# Altium PCB activity_tracker.PcbDoc
Units mm, origin at the board's own origin, x right, y up, seen from the top; angles counter-clockwise.
Board outline 24.9 x 24.88 mm, 4 copper layers (Top Layer, MidLayer1, Mid-Layer 2, Bottom Layer), stack 0.79 mm thick; 28 components, 30 nets, 125 pads, 49 vias.
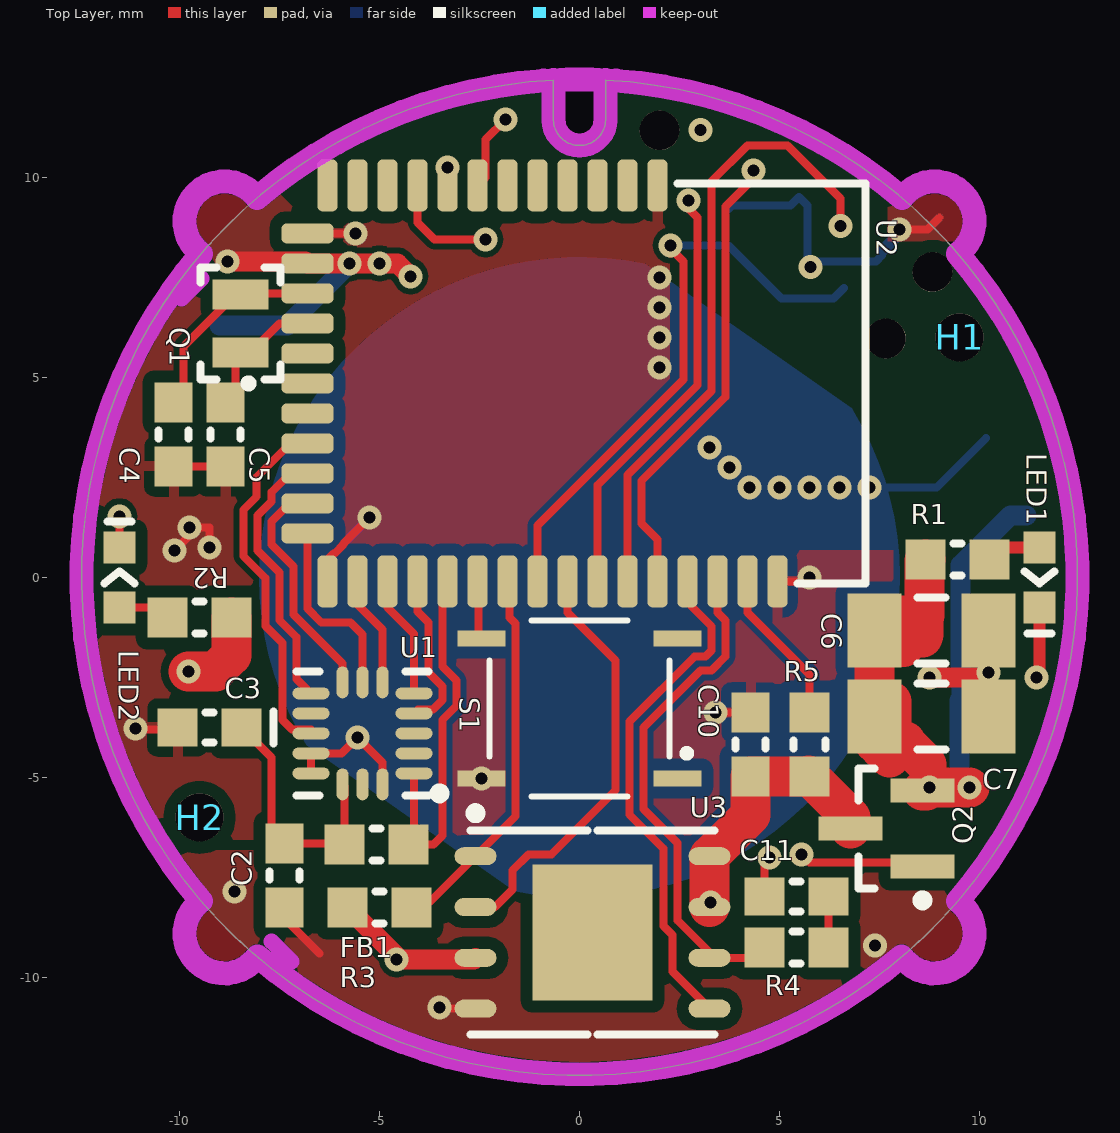
[diagram p0: Top Layer view]
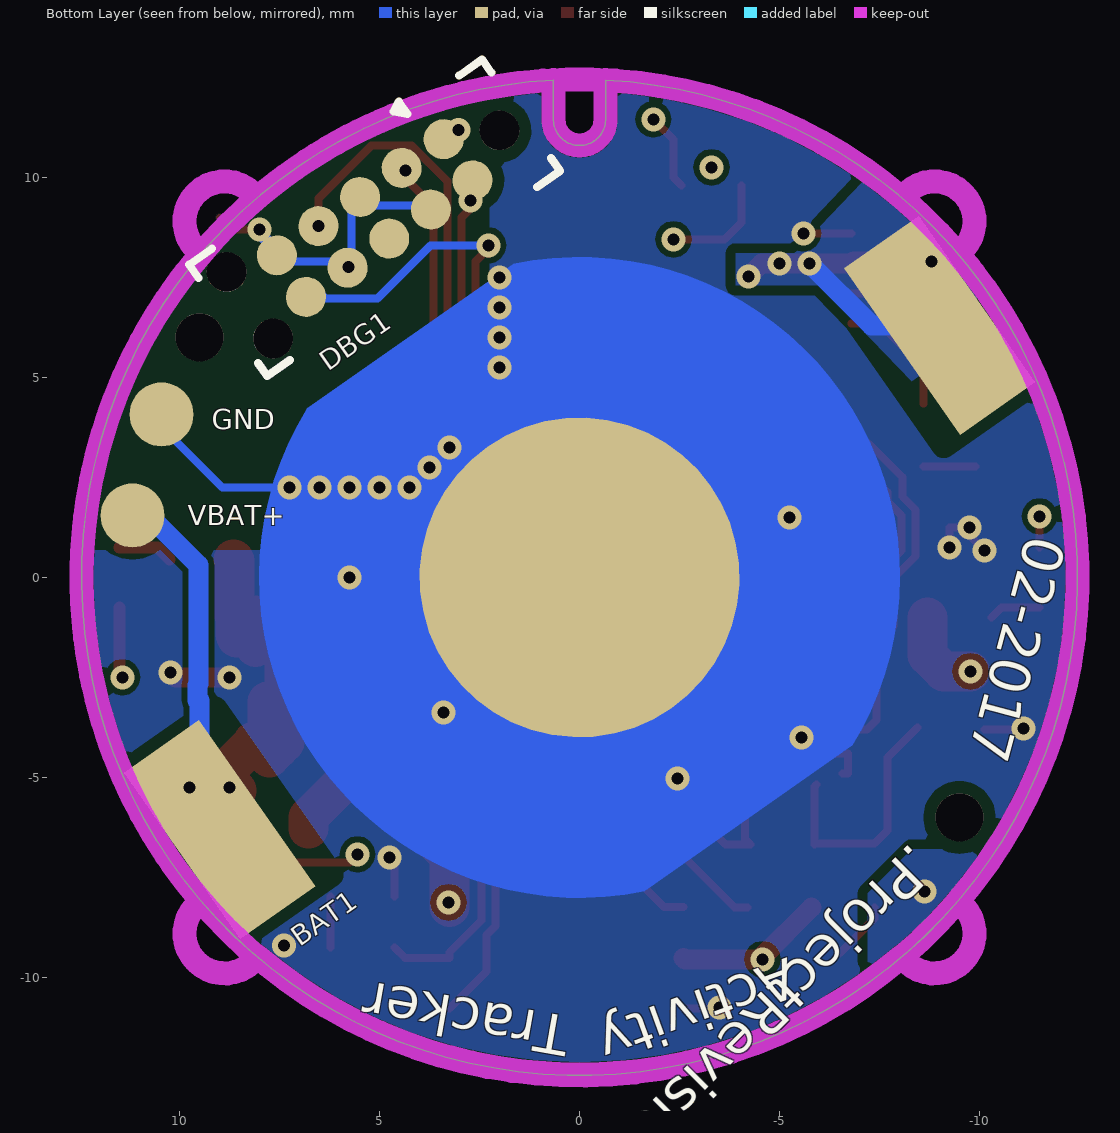
[diagram p1: Bottom Layer view, seen from below]
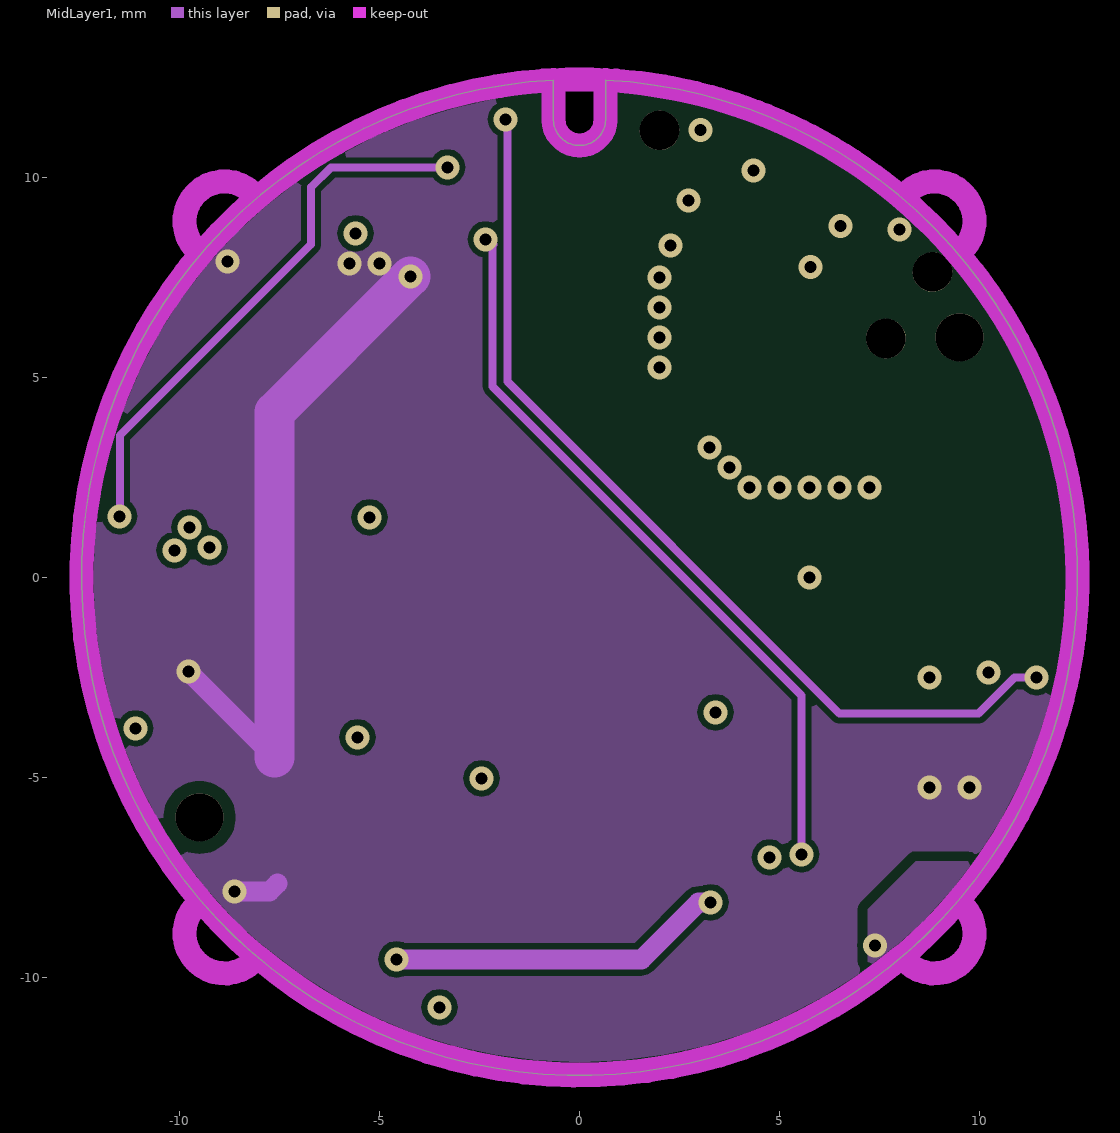
[diagram p2: MidLayer1]
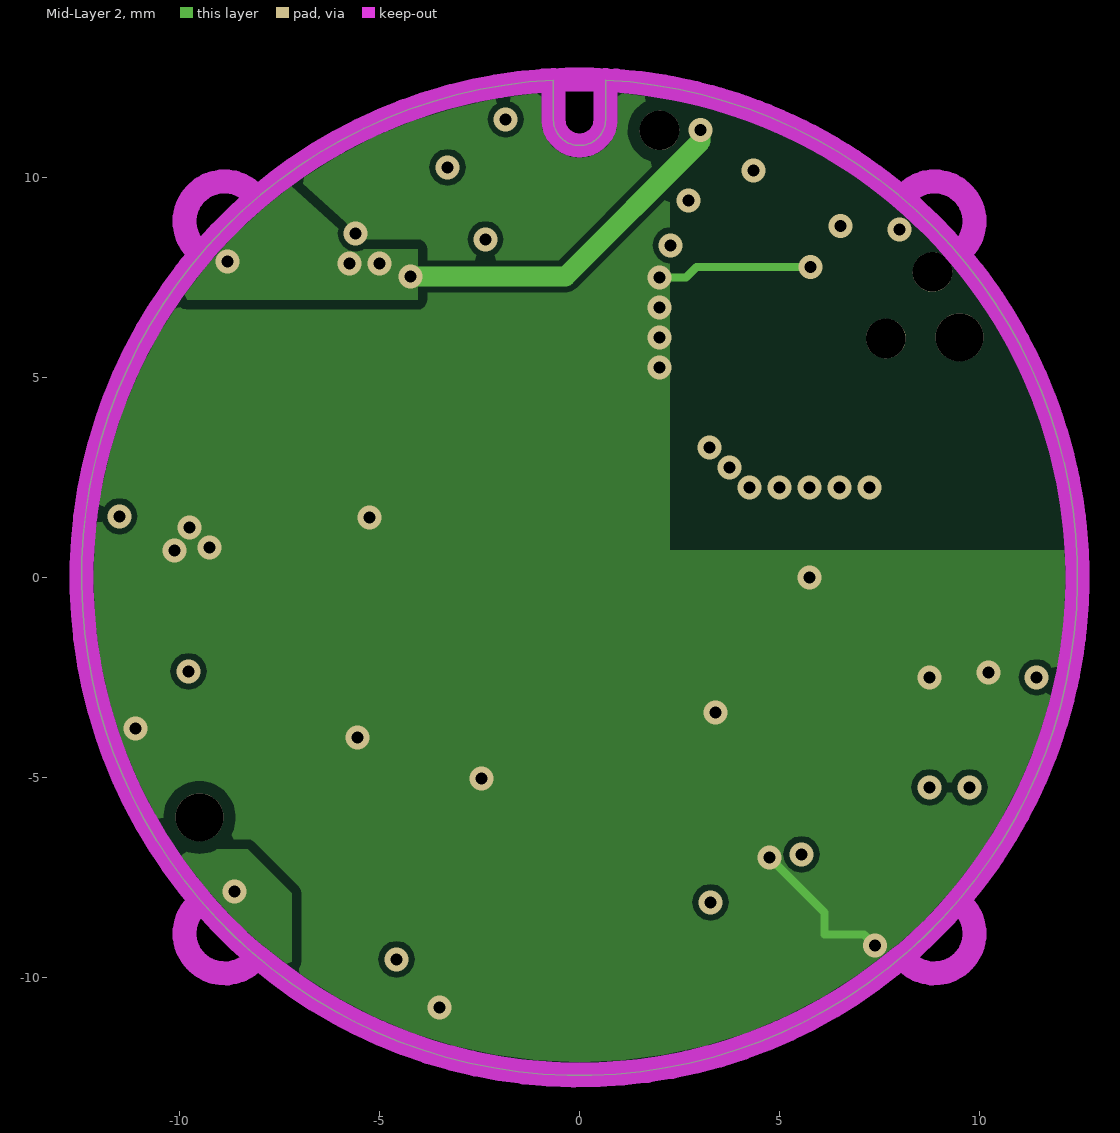
[diagram p3: Mid-Layer 2]

## Layer stack, top to bottom
Top Solder: solder mask 0.0102, Solder Resist, Dk 3.5
Top Layer: signal copper 0.0356
Dielectric1: prepreg 0.1, FR-4, Dk 4.8
MidLayer1: signal copper 0.0356
Dielectric2: prepreg 0.228, FR-4, Dk 4.8
Mid-Layer 2: signal copper 0.0356
Dielectric3: core 0.32, FR-4, Dk 4.8
Bottom Layer: signal copper 0.0356
Bottom Solder: solder mask 0.0102, Solder Resist, Dk 3.5

## Board outline
-0.652,12.433 ccw(c0,0) 0.652,12.433 0.652,11.433 cw(c0,11.45) -0.652,11.433

## Design rules (kind name [scope] priority, off if disabled: settings)
AcuteAngle [All] p1: minimum=4.00000000000000E+0001 checktracksonly=FALSE
Clearance ClearanceLogoStyle1 [All vs InComponentClass('logoStyle1')] p1: gap=0.3 ignorepadtopadclearanceinfootprint=FALSE except(0: Arc-Hole Track-Hole SMDPad-Hole THPad-Hole Via-Hole Fill-Hole Poly-Hole Region-Hole Text-Hole)
Clearance ClearanceKeepout [All vs IsKeepOut] p2: gap=0.001 ignorepadtopadclearanceinfootprint=FALSE except(0: Arc-Hole Track-Hole SMDPad-Hole THPad-Hole Via-Hole Fill-Hole Poly-Hole Region-Hole Text-Hole)
Clearance ClearanceThickWire [IsTrack And AsMM(Width) > 0.2] p3: gap=0.2 ignorepadtopadclearanceinfootprint=FALSE except(0: Arc-Hole Track-Hole SMDPad-Hole THPad-Hole Via-Hole Fill-Hole Poly-Hole Region-Hole Text-Hole)
Clearance ClearancePad [IsPad vs IsPad] p4: gap=0.15 ignorepadtopadclearanceinfootprint=FALSE except(0: Arc-Hole Track-Hole SMDPad-Hole THPad-Hole Via-Hole Fill-Hole Poly-Hole Region-Hole Text-Hole)
Clearance ClearancePolyPad [InPolygon vs IsPad] p5: gap=0.3 ignorepadtopadclearanceinfootprint=FALSE except(0: Arc-Hole Track-Hole SMDPad-Hole THPad-Hole Via-Hole Fill-Hole Poly-Hole Region-Hole Text-Hole)
Clearance ClearancePoly [InPolygon vs InPolygon] p6: gap=0.25 ignorepadtopadclearanceinfootprint=FALSE except(0: Arc-Hole Track-Hole SMDPad-Hole THPad-Hole Via-Hole Fill-Hole Poly-Hole Region-Hole Text-Hole)
Clearance [All] p7: gap=0.15 ignorepadtopadclearanceinfootprint=FALSE except(0: Arc-Hole Track-Hole SMDPad-Hole THPad-Hole Via-Hole Fill-Hole Poly-Hole Region-Hole Text-Hole)
ComponentClearance [All] p1: gap=0.1 collisioncheckmode=3 verticalgap=0.1 showdistances=TRUE
ComponentOrientations [All] p1: allowedrotations=32
Height [All] p1: minheight=0 maxheight=30 prefheight=1
HoleSize [All] p1: absolutevalues=TRUE maxlimit=15 minlimit=0.3 maxpercent=80.000 minpercent=20.000
HoleToHoleClearance [All] p1: gap=0.25 allowstackedmicrovias=TRUE
MinimumAnnularRing [All] p1: minimumring=0.15
MinimumSolderMaskSliver MinimumSolderMaskSliverLogo [All vs ( InComponentClass('ignoreSilkscreen') or InComponentClass('leitwertLogo'))] p1: minsoldermaskwidth=0
MinimumSolderMaskSliver [All] p2: minsoldermaskwidth=0.099
PasteMaskExpansion [All] p1: expansion=-0.025
PermittedLayers [All] p1: toplayerpermitted=TRUE bottomlayerpermitted=FALSE
PlaneClearance [All] p1: clearance=0.5
PlaneConnect [All] p1: planeconnectstyle=Relief reliefexpansion=0.5 reliefentries=4 reliefconductorwidth=0.25 reliefairgap=0.25
PolygonConnect PolygonConnectComponents [All vs InComponentClass('directConnect')] p1: connectstyle=Direct reliefconductorwidth=0.254 reliefentries=4 polygonreliefangle="90 Angle" airgapwidth=0.254
PolygonConnect PolygonConnectVia [IsVia] p2: connectstyle=Direct reliefconductorwidth=0.254 reliefentries=4 polygonreliefangle="90 Angle" airgapwidth=0.254
PolygonConnect PolygonConnectPoly [InPolygonClass('directConnect')] p3: connectstyle=Direct reliefconductorwidth=0.254 reliefentries=4 polygonreliefangle="90 Angle" airgapwidth=0.254
PolygonConnect [All] p4: connectstyle=Relief reliefconductorwidth=0.25 reliefentries=4 polygonreliefangle="90 Angle" airgapwidth=0.254
RoomDefinition Memory [InComponentClass('Memory')] p1: confinementstyle=ConfineIn formatcopy=TRUE lockcomponents=FALSE outline -19,-16.2 19,-16.2 19,17 -19,17
RoomDefinition activity_tracker [InComponentClass('activity_tracker')] p2: confinementstyle=ConfineIn formatcopy=TRUE lockcomponents=FALSE outline -36,-21 179.2,-21 179.2,16 -36,16
RoomDefinition Accelerometer [InComponentClass('Accelerometer')] p3: confinementstyle=ConfineIn formatcopy=TRUE lockcomponents=FALSE outline -20.8,-16 21,-16 21,17 -20.8,17
RoutingCorners [All] p1: cornerstyle=45-Degree minsetback=2.5 maxsetback=2.5
RoutingVias [All] p1: holewidth=0.3 width=0.6 viastyle="Through Hole" minholewidth=0.3 minwidth=0.5 maxholewidth=1.5 maxwidth=2
SilkToSilkClearance [All] p1: silktosilkclearance=0.1
SilkToSolderMaskClearance SilkscreenOverComponentPadsLogo [IsPad vs ( InComponentClass('ignoreSilkscreen') or InComponentClass('logoStyle1'))] p1: minsilkscreentomaskgap=0 clearancetoexposedcopper=TRUE
SilkToSolderMaskClearance SilkscreenOverComponentPads [IsPad vs not InComponentClass('ignoreSilkscreen')] p2: minsilkscreentomaskgap=0.001 clearancetoexposedcopper=TRUE
SolderMaskExpansion SolderMaskExpansionVia [IsVia] p1: expansion=-0.635
SolderMaskExpansion [All] p2: expansion=0.038
Width WidthLogoStyle1 [InComponentClass('logoStyle1')] p1: maxlimit=100 minlimit=0.15 preferedwidth=0.25 checkconnectedcopper=TRUE
Width [All] p2: maxlimit=10 minlimit=0.2 preferedwidth=0.2
19 further rules are at their usual default settings.

## Classes and differential pairs
component class Memory: C10 C11 Q2 R3 R4 R5 U3
component class directConnect: BAT1 GND H1 H2 Q1 Q2 S1 U3 VBAT+
component class activity_tracker: BAT1 C4 C5 C6 C7 DBG1 GND H1 H2 LED1 LED2 Q1 R1 R2 S1 U2 VBAT+
component class Accelerometer: C2 C3 FB1 U1
component class ignoreSilkscreen: C4 C5 Q1

## Components (designator, comment, footprint, x,y, rotation, side; value= is the part's Value field where it differs from the comment)
BAT1 "BATTERY" BK-912_MIN_FP 0,0 r145 bottom
C2 "100n" CAPC1608X95N -7.375,-7.45 r90 top
C3 "1u" CAPC1608X95N_POL -9.25,-3.75 r180 top
C4 "16p" CAPC1608X95N -10.15,3.575 r90 top
C5 "16p" CAPC1608X95N -8.85,3.575 r90 top
C6 "100u" CAPC3216X18N 8.8,-1.325 r180 top
C7 "100u" CAPC3216X18N 8.8,-3.475 r180 top
C10 "1n" CAPC1608X95N 4.275,-4.175 r270 top
C11 "47p" CAPC1608X95N 5.425,-7.975 r180 top
DBG1 "TC2050-IDC-NL" TC2050-IDC-NL 5.121,8.99 r235 bottom
FB1 "" RESC1608X55N -5.075,-6.675 r180 top
GND "Testpoint" POGO1 10.45,4.075 r270 bottom
H1 "HOLE" M1_SMALL_NOKEEPOUT 9.5,6 r0 top
H2 "HOLE" M1_SMALL_NOKEEPOUT -9.5,-6 r0 top
LED1 "RED" LED0603 11.5,0 r270 top
LED2 "GREEN" LED0603 -11.5,0 r90 top
Q1 "32.768kHz" ABS06 -8.475,6.35 r90 top
Q2 "PFET" SOT95P237X112-3N 7.675,-6.275 r180 top
R1 "1k" RESC1608X55N 9.45,0.45 r180 top
R2 "1k" RESC1608X55N -9.5,-1 r0 top
R3 "10k" RESC1608X55N -5,-8.25 r180 top
R4 "75R" RESC1608X55N 5.425,-9.25 r0 top
R5 "1k" RESC1608X55N 5.75,-4.175 r90 top
S1 "SW-PB-4T" TL3315NF160Q 0,-3.275 r180 top
U1 "ADXL363" LGA_ADXL363 -5.425,-3.9 r180 top
U2 "BL652-SA" BL652-SA_NO_KEEPOUT 0.15,4.85 r270 top
U3 "IS25LP128" QFN127P500X600X80-8M_MIN_EP 0.325,-8.875 r270 top
VBAT+ "Testpoint" POGO1 11.175,1.55 r270 bottom

## Footprints (in the part's own frame and the unit in brackets; to place one, negate y for a bottom-side part, rotate by r counter-clockwise, add the part's x,y. Pads: shape width x height; smd on the part's side, far side on the other; paste and mask are expansions set on the pad)
ABS06 [mm] "Crystal 8.0000MSMD LOW PROFILE CRYSTAL"
  rect 0.75x1.4 smd: 1(-0.725,0) 2(0.725,0)
  silkscreen extent -1.6,-1 1.4,1, body extent -1,-0.6 1,0.6, height 0.6
BK-912_MIN_FP [mm] "CR2032 Battery Retainer"
  rect 2.29x5.08 smd: +(-10.985,0) +(10.985,0)
  round 8 smd paste-10: -(0,0)
  Top Layer region: -3.176,-7.353 3.176,-7.353 3.176,-7.353 6.142,-5.142 7.797,-1.834 7.789,1.865 6.12,5.167 3.146,7.366 3.146,7.366 3.146,7.366 -3.146,7.366 -6.121,5.167 -7.79,1.865 -7.797,-1.834 -6.142,-5.142 -3.176,-7.353
  body extent -11.43,-10 11.43,10, height 4.32
BL652-SA_NO_KEEPOUT [mm] "Intelligent BTv4.0 nrf52 based module (BL652-SA)"
  rrect50% 1.3x0.5 smd: 1(4.95,4.8) 2(4.95,4.05) 3(4.95,3.3) 4(4.95,2.55) 5(4.95,1.8) 6(4.95,1.05) 7(4.95,0.3) 8(4.95,-0.45) 9(4.95,-1.2) 10(4.95,-1.95) 11(4.95,-2.7) 12(4.95,-3.45) 13(4.95,-4.2) 14(4.95,-4.95) 15(4.95,-5.7) 16(4.95,-6.45) 28(-4.95,-6.45) 29(-4.95,-5.7) 30(-4.95,-4.95) 31(-4.95,-4.2) 32(-4.95,-3.45) 33(-4.95,-2.7) 34(-4.95,-1.95) 35(-4.95,-1.2) 36(-4.95,-0.45) 37(-4.95,0.3) 38(-4.95,1.05) 39(-4.95,1.8)
  rrect50% 0.5x1.3 smd: 17(3.75,-6.95) 18(3,-6.95) 19(2.25,-6.95) 20(1.5,-6.95) 21(0.75,-6.95) 22(0,-6.95) 23(-0.75,-6.95) 24(-1.5,-6.95) 25(-2.25,-6.95) 26(-3,-6.95) 27(-3.75,-6.95)
  silkscreen extent -5,2.3 5,7, body extent -5,-7 5,7, height 2.1
CAPC1608X95N [mm] "Chip Capacitor, 2-Leads, Body 1.6x0.8mm, IPC Medium Density, 0603"
  rect 1x0.95 smd: 1(-0.8,0) 2(0.8,0)
  silkscreen extent -0.1,-0.38 0.1,0.38, body extent -0.8,-0.4 0.8,0.4, height 0.95
CAPC1608X95N_POL [mm] "Chip Capacitor, 2-Leads, Body 1.6x0.8mm, IPC Medium Density, 0603"
  rect 1x0.95 smd: 1(-0.8,0) 2(0.8,0)
  silkscreen extent -1.6,-0.4 0.1,0.4, body extent -0.8,-0.4 0.8,0.4, height 0.95
CAPC3216X18N [mm] "Chip Capacitor, 2-Leads, Body 3.2x1.6mm, IPC Medium Density"
  rect 1.35x1.85 smd: 1(-1.425,0) 2(1.425,0)
  silkscreen extent -0.35,-0.82 0.35,0.82, body extent -1.7,-0.9 1.7,0.9, height 1.8
LED0603 [mm] "1.6X0.8mm SMD CHIP LED"
  rect 0.8x0.8 smd: 1(-0.75,0) 2(0.75,0)
  silkscreen extent -0.15,-0.38 1.4,0.38, body extent -0.8,-0.4 0.8,0.4, height 0.55
LGA_ADXL363 [mm] "LGA, 16-Leads, Body 3.1x3.3mm (max), Pitch 0.50mm, IPC Low Density"
  oval 0.925x0.3 smd: 1(-1.288,1) 2(-1.288,0.5) 3(-1.288,0) 4(-1.288,-0.5) 5(-1.288,-1) 9(1.288,-1) 10(1.288,-0.5) 11(1.288,0) 12(1.288,0.5) 13(1.288,1)
  oval 0.3x0.8 smd: 6(-0.5,-1.275) 7(0,-1.275) 8(0.5,-1.275) 14(0.5,1.275) 15(0,1.275) 16(-0.5,1.275)
  silkscreen extent -2.05,-1.55 1.65,1.62, body extent -1.65,-1.55 1.65,1.55, height 1.14
M1_SMALL_NOKEEPOUT [mm] "Plated M1Hole Small Size, Dia 1.2mm"
  round 1.2 hole 1.2 paste-3: H(0,0)
POGO1 [mm] "Pad for POGO PIN connection, 1.6 diameter"
  round 1.6 smd paste-2: 1(0,0)
  body extent -0.3,-0.3 0.3,0.3, height 1
QFN127P500X600X80-8M_MIN_EP [mm] "QFN, 8-Leads, Body 6.1x5.1mm (max), Pitch 1.27mm, IPC Low Density"
  oval 0.45x1.05 smd: 1(-1.905,-2.925) 2(-0.635,-2.925) 3(0.635,-2.925) 4(1.905,-2.925) 5(1.905,2.925) 6(0.635,2.925) 7(-0.635,2.925) 8(-1.905,2.925)
  rect 3.4x3 smd paste-1: 9(0,0)
  silkscreen extent -3.1,-3.05 2.55,3.05, body extent -2.55,-3.05 2.55,3.05, height 0.8
RESC1608X55N [mm] "Chip Resistor, 2-Leads, Body 1.6x0.8mm, IPC Medium Density, 0603"
  rect 1x1 smd: 1(-0.8,0) 2(0.8,0)
  silkscreen extent -0.1,-0.4 0.1,0.4, body extent -0.8,-0.4 0.8,0.4, height 0.55
SOT95P237X112-3N [mm] "SOT23, 3-Leads, Body 3.0x2.6mm (max), Pitch 0.95mm, IPC Medium Density"
  rect 1.6x0.6 smd: 1(-0.9,0.95) 2(-0.9,-0.95) 3(0.9,0)
  silkscreen extent -1.03,-1.5 0.7,1.92, body extent -0.7,-1.52 0.7,1.52, height 1.12
TC2050-IDC-NL [mm] "1.27MM POGO PIN Connector"
  round 0.991 hole 0.991 paste-0.5: 0(-1.016,-3.81) 0(0,3.81) 0(1.016,-3.81)
  round 1 smd paste-0.5: 1(-0.62,2.54) 2(-0.635,1.27) 3(-0.635,0) 4(-0.635,-1.27) 5(-0.635,-2.54) 6(0.635,-2.54) 7(0.635,-1.27) 8(0.635,0) 9(0.635,1.27) 10(0.635,2.54)
  silkscreen extent -2.03,-4.47 1.7,4.47
TL3315NF160Q [mm] "Tactile Switch SPST-NO Top Actuated Surface Mount"
  rect 1.2x0.4 smd: 1(-2.45,1.75) 2(2.45,1.75) 3(-2.45,-1.75) 4(2.45,-1.75)
  silkscreen extent -2.74,-2.2 2.25,2.2, body extent -2.25,-2.25 2.25,2.25, height 0.65

## Part data
BAT1: "Battery", ClassName=directConnect
C2: library part C, "Capacitor", Supplier Part Number 1=311-1088-1-ND, Voltage=16V, Supplier 1=Digi-Key
C3: library part CPOL, "Polarized Capacitor (Surface Mount)", Supplier Part Number 1=478-8658-1-ND, Voltage=16V, Supplier 1=Digi-Key
C4 C5: library part C, "Capacitor", Supplier Part Number 1=1276-2204-1-ND, Voltage=50V, ClassName=ignoreSilkscreen, Supplier 1=Digi-Key
C6 C7: library part C, "Capacitor", Supplier Part Number 1=490-10525-1-ND, Voltage=6V3, Supplier 1=Digi-Key
C10: library part C, "Capacitor", Supplier Part Number 1=478-1215-1-ND, Voltage=50V, Supplier 1=Digi-Key
C11: library part C, "Capacitor", Supplier Part Number 1=1276-1037-1-ND, Voltage=50V, Supplier 1=Digi-Key
DBG1: "ARM Mini JTAG / SWD 10-pin connector", Supplier Part Number 1=TC2050-IDC-NL-ND, Supplier 1=Digi-Key
FB1: library part FB, "Ferrite Bead", Supplier Part Number 1=587-1895-1-ND, Supplier 1=Digi-Key
H1 H2: "Hole", ClassName=directConnect
LED1: library part LED, "LED", Supplier Part Number 1=754-1541-1-ND, Color=RED, Supplier 1=Digi-Key
LED2: library part LED, "LED", Supplier Part Number 1=160-1478-1-ND, Supplier 1=Digi-Key
Q1: library part Q-0Shield, "Crystal", Supplier Part Number 1=535-10247-1-ND, ClassName=directConnect,ignoreSilkscreen, Frequency=32.768kHz, Supplier 1=Digi-Key
Q2: library part IRLML2246TRPBF, "P-Channel MOSFET, 20V 2.6A", Supplier Part Number 1=IRLML2246TRPBFCT-ND, ClassName=directConnect, Supplier 1=Digi-Key
R1 R2 R5: library part R, "Resistor", Supplier Part Number 1=1276-5062-1-ND, Supplier 1=Digi-Key
R3: library part R, "Resistor", Supplier Part Number 1=311-10KGRCT-ND, Supplier 1=Digi-Key
R4: library part R, "Resistor", Supplier Part Number 1=RHM75.0CFCT-ND, Supplier 1=Digi-Key
S1: "Tact switch", Supplier Part Number 1=EG4621CT-ND, ClassName=directConnect, Supplier 1=Digi-Key
U1: "Micropower 3-Sensor Combination  Including Acceleration and Temperature", Supplier Part Number 1=ADXL363BCCZ-RL7CT-ND, Supplier 1=Digi-Key
U2: "RF TXRX MOD BLUETOOTH INT ANT", Supplier Part Number 1=BL652-SA-01-CT-ND, Supplier 1=Digi-Key
U3: "3V SERIAL FLASH MEMORY WITH 133MHZ MULTI  I/O   SPI & QUAD I/O QPI DTR INTERFACE", Supplier Part Number 1=706-1341-ND, ClassName=directConnect, Supplier 1=Digi-Key
GND VBAT+: ClassName=directConnect

## Via types
v1: diameter 0.6, hole 0.3, Top Layer to Bottom Layer, 49 vias

## Nets (pads, with @x,y where several pads share a name; then routed paths per layer and width w, separated by ;. In a path a pad name is that pad's centre, name@x,y a point inside that pad or via, vN(x,y) a via of type N, cw(c..) or ccw(c..) an arc to the next point about the centre after c; other vN are vias at no path point)
ACC_ADC: U1.5 U2.14 | length 3.1
  Top Layer w0.2: U2.14 -4.8,-0.75 -4.137,-1.412 U1.5
ACC_C\S\: U1.8 U2.18 | length 5.8
  Top Layer w0.2: U2.18 -7.25,1.85 -7.7,1.4 -7.7,0.82 -7.15,0.27 -7.15,-0.925 -5.925,-2.15 U1.8
ACC_INT1: U1.11 U2.20 | length 9.1
  Top Layer w0.2: U2.20 -7.23,3.35 -8.07,2.51 -8.07,2.02 -8.4,1.69 -8.4,0.53 -7.85,-0.02 -7.85,-1.215 -7.425,-1.64 -7.425,-3.566 -7.191,-3.8 -6.713,-3.8 U1.11
ACC_INT2: U1.9 U2.19 | length 6.8
  Top Layer w0.2: U2.19 -7.23,2.6 -7.7,2.13 -7.7,1.895 -8.05,1.545 -8.05,0.675 -7.5,0.125 -7.5,-1.07 -7.075,-1.495 -7.075,-2.537 U1.9
ACC_MISO: U1.7 U2.17 | length 4.7
  Top Layer w0.2: U2.17 -6.8,-0.78 -6.455,-1.125 -5.725,-1.125 -5.425,-1.425 U1.7
ACC_MOSI: U1.6 U2.15 | length 2.8
  Top Layer w0.2: U2.15 -5.55,-0.675 -4.925,-1.3 U1.6
ACC_PWR: FB1.1 U1.1 U2.12 | length 9.5
  Top Layer w0.2: U1.1 -4.137,-6.538 FB1.1 -3.65,-6.675 -3.425,-6.45 -3.425,-3.561 -3.075,-3.211 -3.075,-2.58 -3.425,-2.23 -3.425,-0.225 U2.12
ACC_SCK: U1.4 U2.13 | length 4.1
  Top Layer w0.2: U1.4 -4.037,-3.3 -3.659,-3.3 -3.425,-3.066 -3.425,-2.725 -3.775,-2.375 -3.775,-1.125 -4.05,-0.85 U2.13
FL_C\S\: R3.1 U2.10 U3.1 | length 9.5
  Top Layer w0.2: R3.1 -3.88,-8.25 U3.1 -1.6,-5.97 -1.6,-1.15 -1.75,-1 -1.75,-0.15 U2.10
FL_E\N\: Q2.1 U2.31 | length 24.7
  Top Layer w0.2: U2.31 -4.05,8.875 -3.625,8.45 v1(-2.35,8.45) ; v1(5.55,-6.925) 5.75,-7.125 8.475,-7.125 Q2.1
  MidLayer1 w0.2: v1(-2.35,8.45) -2.275,8.45 -2.15,8.325 -2.175,8.3 -2.175,4.775 5.55,-2.95 v1(5.55,-6.925)
FL_F\S\H\D\N\: R5.2 U2.2 | length 3.9
  Top Layer w0.2: U2.2 4.2,-0.875 5.75,-2.425 R5.2
FL_MISO: U2.8 U3.2 | length 10.7
  Top Layer w0.2: U3.2 -2.115,-8.24 -1.675,-7.8 -1.675,-7.321 -1.279,-6.925 -0.705,-6.925 0.9,-5.32 0.9,-2.075 -0.3,-0.875 U2.8
FL_MOSI: U2.4 U3.5 | length 12.8
  Top Layer w0.2: U2.4 2.7,-0.621 3.3,-1.221 3.3,-1.829 3.154,-1.975 2.88,-1.975 1.25,-3.605 1.25,-5.934 2.1,-6.784 2.1,-8.716 2.325,-8.941 2.325,-9.855 U3.5
FL_SCK: R4.1 U2.3 U3.6 | length 12.7
  Top Layer w0.2: U2.3 3.45,-0.876 3.65,-1.076 3.65,-1.974 3.299,-2.325 3.025,-2.325 1.6,-3.75 1.6,-5.789 2.45,-6.639 2.45,-8.571 3.25,-9.371 U3.6 4.365,-9.51 R4.1
GND: BAT1.- C2.1 C3.2 C4.1 C5.1 C6.1 C7.1 C10.1 C11.2 DBG1.3 DBG1.5 DBG1.7 DBG1.9 GND.1 S1.2 U1.12 U1.13 U1.16 U2.1 U2.16 U2.27 U2.39 U3.4 | length 42.7
  Top Layer w0.2: v1(-11.1,-3.775) -11.075,-3.8 C3.2@-10.125,-3.8 ; v1(-10.125,0.675) -9.75,1.05 v1(-9.75,1.25) -9.25,1.25 v1(-9.25,0.75) ; C4.1@-9.9,2.775 C5.1 C5.1@-8.6,2.775 ; C2.1 -7.375,-8.525 -6.5,-9.4 ; U2.27 v1(-5.6,8.6) ; U1.13@-6.575,-4.9 U1.13 U1.12 -5.95,-4.4 v1(-5.55,-4) -4.925,-4.625 U1.16 ; U2.16 -6.3,0.45 -6.15,0.6 -6.12,0.6 -5.9,0.82 -5.9,0.85 v1(-5.25,1.5) ; v1(-3.5,-10.75) -3.47,-10.78 U3.4 ; v1(3.4,-3.375) C10.1 ; C11.2 4.625,-7.125 v1(4.75,-7) ; U2.1 5.65,-0.1 v1(5.75,0) ; v1(8,8.7) 8.7,8.7 9,9
  Top Layer w0.5: v1(8.75,-2.5) 10.1,-2.5 v1(10.225,-2.375)
  Mid-Layer 2 w0.2: v1(2,7.5) 2.659,7.5 2.922,7.763 v1(5.776,7.763) ; v1(4.75,-7) 6.125,-8.375 6.125,-8.925 7.112,-8.925 v1(7.388,-9.201)
  Bottom Layer w0.2: v1(2,5.25) v1(2,6) v1(2,6.75) v1(2,7.5) ; v1(3.25,3.25) v1(3.75,2.75) v1(4.25,2.25) v1(5,2.25) v1(5.75,2.25) v1(6.5,2.25) v1(7.25,2.25) 8.93,2.25 GND.1@10.16,3.48 ; DBG1.9 3.818,9.3 5.275,9.3 DBG1.3 5.7,9.295 DBG1.7@5.7,7.838 ; DBG1.7 5.956,7.9 7.413,7.9 DBG1.5 DBG1.5@7.566,8.166 ; v1@8,8.6 v1(8,8.7)
  Bottom Layer w0.3: DBG1.5@7.566,8.166 v1@8,8.6
  other v1: -2.45,-5.025
INT_BUT: S1.4 U2.11 | length 1.5
  Top Layer w0.2: U2.11 -2.525,-0.125 -2.525,-1.45 S1.4
LED1: LED1.2 U2.33 | length 27.3
  Top Layer w0.2: U2.33 -2.35,10 -2.35,10.945 v1(-1.845,11.45)
  Top Layer w0.3: v1(11.426,-2.5) 11.5,-2.426 LED1.2
  MidLayer1 w0.2: v1(-1.845,11.45) -1.8,11.405 -1.8,4.895 6.495,-3.4 9.978,-3.4 10.878,-2.5 v1(11.426,-2.5)
LED2: LED2.2 U2.32 | length 14.6
  Top Layer w0.2: LED2.2 v1(-11.5,1.525)
  MidLayer1 w0.2: v1(-11.5,1.525) -11.492,1.533 -11.492,3.545 -6.709,8.328 -6.709,9.754 -6.213,10.25 v1(-3.3,10.25)
NetC2_2: C2.2 C3.1 FB1.2 U1.14 | length 6.4
  Top Layer w0.2: C3.1 -7.7,-4.5 -7.7,-6.325 C2.2 -5.9,-6.65 FB1.2 -5.875,-5.225 U1.14
NetC11_1: C11.1 R4.2 | length 1.3
  Top Layer w0.2: R4.2 C11.1
NetLED1_1: LED1.1 R1.1 | length 1.4
  Top Layer w0.3: R1.1 10.55,0.75 LED1.1
NetLED2_1: LED2.1 R2.1 | length 1.3
  Top Layer w0.2: LED2.1 -10.55,-0.75 R2.1
RESET: DBG1.10 U2.7 | length 10.7
  Top Layer w0.2: U2.7 0.45,2.305 2.95,4.805 2.95,9 2.725,9.225 v1(2.725,9.425)
SWDCLK: DBG1.4 U2.6 | length 15.7
  Top Layer w0.2: U2.6 1.2,2.56 3.3,4.66 3.3,9.903 4.197,10.8 5.2,10.8 6.526,9.474 v1(6.526,8.781)
SWDIO: DBG1.2 U2.5 | length 11.6
  Top Layer w0.2: U2.5 1.95,0.95 1.55,1.35 1.55,2.415 3.65,4.515 3.65,9.275 4.35,9.975 v1(4.35,10.175)
SWO: DBG1.6 U2.9 | length 15.2
  Top Layer w0.2: U2.9 -1.05,1.3 2.6,4.95 2.6,7.9 v1@2.275,8.225 ; v1@2.275,8.1 v1@2.275,8.225 ; v1(2.275,8.3) v1@2.275,8.225
  Bottom Layer w0.2: v1(2.275,8.3) 3.725,8.3 5.05,6.975 6.35,6.975 DBG1.6@6.612,7.238
V_FL+: C10.2 Q2.3 R3.2 R5.1 U3.3 U3.7 U3.8 | length 20.7
  Top Layer w0.2: C10.2 R5.1
  Top Layer w0.5: R3.2 -4.54,-9.51 -4.575,-9.545 v1(-4.575,-9.55) -2.64,-9.55 U3.3
  Top Layer w1: U3.7 U3.8 4.275,-5.945 C10.2 5.7,-4.975 5.725,-4.95 R5.1 6.775,-6 Q2.3
  MidLayer1 w0.5: v1(-4.575,-9.55) 1.55,-9.55 2.975,-8.125 v1(3.275,-8.125)
VBAT+: BAT1.+ C6.2 C7.2 DBG1.1 Q2.2 R1.2 R2.2 U2.26 VBAT+.1 | length 55.4
  Top Layer w0.5: v1(-8.8,7.9) -6.85,7.9 U2.26 v1(-5.75,7.85) v1(-5,7.85) -4.55,7.85 v1(-4.225,7.525)
  Top Layer w1: v1(-9.775,-2.35) -9.1,-2.35 -8.7,-1.95 R2.2 ; C7.2@7.375,-4.125 7.525,-4.275 7.75,-4.5 ; C7.2@7.375,-3.725 7.728,-3.725 7.8,-3.797 7.8,-3.1 7.55,-3.1 7.375,-2.925 C6.2 7.725,-1.325 8.1,-0.95 8.1,-1.736 8.336,-1.5 8.575,-1.5 8.575,-1.45 8.6,-1.425 8.6,-0.975 8.625,-0.95 8.625,0.425 R1.2 ; 8.075,-4.175 8.151,-4.099 8.151,-4.149 8.676,-4.674 ; Q2.2 8.675,-5.325 v1(8.75,-5.25) v1(9.75,-5.25)
  MidLayer1 w0.5: v1(-9.775,-2.35) -7.625,-4.5 -7.62,-4.5 ; v1(-8.625,-7.85) -7.75,-7.85 -7.55,-7.65
  MidLayer1 w1: -7.62,-4.5 -7.62,4.13 v1(-4.225,7.525)
  Mid-Layer 2 w0.5: v1(-4.225,7.525) -0.35,7.525 3.029,10.904 v1(3.029,11.179)
  Bottom Layer w0.2: v1(3.029,11.179) DBG1.1@3.171,11.179
  Bottom Layer w0.5: BAT1.+@-8.998,6.301 -7.299,6.301 v1(-5.75,7.85) ; BAT1.+@9.5,-5.25 9.5,-3.075 9.545,-3.075 9.545,-2.685 9.525,-2.665 9.525,0.305 10.77,1.55 VBAT+.1
XL1: C4.2 Q1.2 U2.25 | length 5.1
  Top Layer w0.2: C4.2@-9.9,4.35 -9.9,5.774 -8.649,7.025 -8.6,7.025 -8.525,7.1 U2.25
XL2: C5.2 Q1.1 U2.24 | length 3.3
  Top Layer w0.2: C5.2@-8.6,4.35 -8.6,5.575 -8.275,5.575 -7.5,6.35 U2.24
pads on no net: DBG1.0 DBG1.8 H1.H H2.H S1.1 S1.3 U1.2 U1.3 U1.10 U1.15 U2.21 U2.22 U2.23 U2.28 U2.29 U2.30 U2.34 U2.35 U2.36 U2.37 U2.38 U3.9

## Polygon pours and split planes (outlines as drawn)
GND on Top Layer "GND" (solid, remove dead copper, pour order 28): 10.775,10.425 7.7,10.425 7.7,8.4 10.775,8.4
VBAT+ on Top Layer "VBAT+" (solid, remove dead copper, pour order 16): -7.8,-10.075 -7.8,-6.82 -10,-6.82 -10,-10.075
GND on Top Layer "GND" (solid, remove dead copper, pour order 48): 2.25,14.85 2.25,0.675 13.675,0.675 13.675,-13.125 -7.3,-13.125 -13.3,-13.125 -13.3,8.725 -13.3,14.85 2.25,14.85
VBAT+ on Top Layer "VBAT+" (solid, remove dead copper, pour order 5): -5.75,7.85 -8.025,10.125 -9.925,10.125 -9.925,7.85
VBAT+ on Mid-Layer 2 "VBAT+" (solid, remove dead copper, pour order 12): -4.049,6.945 -4.049,8.2 -5.465,8.2 -7.59,10.125 -9.925,10.125 -9.925,6.945
GND on Mid-Layer 2 "GND" (solid, remove dead copper, pour order 46): 2.25,14.85 2.25,0.675 13.675,0.675 13.675,-13.125 -7.3,-13.125 -13.3,-13.125 -13.3,8.725 -13.3,14.85 2.25,14.85
VBAT+ on Mid-Layer 2 "VBAT+" (solid, remove dead copper, pour order 20): -7.2,-10.075 -7.2,-7.9 -8.3,-6.8 -10,-6.8 -10,-10.075
GND on Mid-Layer 2 "GND" (solid, remove dead copper, pour order 40): 10.55,-7.575 7.25,-7.575 7.25,-11.2 10.55,-11.2
VBAT+ on Bottom Layer "VBAT+" (solid, remove dead copper, pour order 14): -5.989,7.3 -3.9,7.3 -3.9,8.1 -5.374,8.1 -7.299,10.125 -9.925,10.125 -9.925,6.078 -8.3,4.9
GND on Bottom Layer "GND" (solid, remove dead copper, pour order 52): 2.25,14.85 2.25,0.675 13.675,0.675 13.675,-13.125 -7.3,-13.125 -13.3,-13.125 -13.3,8.725 -13.3,14.85 2.25,14.85
VBAT+ on Bottom Layer "VBAT+" (solid, remove dead copper, pour order 50): -7.2,-10.075 -7.2,-7.9 -8.3,-6.8 -10,-6.8 -10,-10.075
VBAT+ on MidLayer1 "VBAT+" (solid, remove dead copper, pour order 10): -5.75,7.85 -8.025,10.125 -9.925,10.125 -9.925,7.85
VBAT+ on MidLayer1 "VBAT+" (solid, remove dead copper, pour order 44): 2.25,14.85 2.25,0.675 13.675,0.675 13.675,-13.125 -7.3,-13.125 -13.3,-13.125 -13.3,8.725 -13.3,14.85 2.25,14.85
VBAT+ on MidLayer1 "VBAT+" (solid, remove dead copper, pour order 18): -7.8,-10.075 -7.8,-6.82 -10,-6.82 -10,-10.075
GND on MidLayer1 "GND" (solid, remove dead copper, pour order 38): 10.55,-7.1 8.4,-7.1 7.2,-8.3 7.2,-11.2 10.55,-11.2

## Keep-outs
Top Layer:
  lines w0.4: -9.951,6.968 -9.451,7.468 ; -7.7,-9.1 -7.2,-9.6
MidLayer1:
  circle w0.599: c0,0 r12.45
Mid-Layer 2:
  circle w0.599: c0,0 r12.45
Bottom Layer:
  circle w0.599: c0,0 r12.45
Keep-Out Layer:
  lines w0.599: -8.064,-9.485 cw(c-8.875,-8.9) -9.462,-8.091 cw(c0,0) -9.463,8.091 cw(c-8.875,8.9) -8.064,9.485 ; -8.062,9.487 cw(c0,0) 8.064,9.485 cw(c8.875,8.9) 9.462,8.091 cw(c0,0) 9.463,-8.091 cw(c8.875,-8.9) 8.064,-9.485 ; -8.052,-9.471 ccw(c0,0.025) 8.052,-9.471 ; -0.652,12.433 -0.652,11.433 ccw(c0,11.45) 0.652,11.433 0.652,12.433

## Silkscreen, mask and mechanical layers (free items; w line width, h text height)
Bottom Overlay:
  text "02-2017" at -11.2,1.1 h1 r105
  text ".ProjectRevision" at -8.3,-6.6 h1 r135
  text "Activity" at -5.2,-9.5 h1 r160
  text "Tracker" at 0.2,-11 h1 r190
Mechanical 15:
  circle w0.2: c0,0 r10
  lines w1: -10.342,-7.794 cw(c0,0) -10.342,7.793 ; -7.794,-10.342 ccw(c0,0) 7.794,-10.342 ; -7.794,10.342 cw(c0,0) 7.794,10.342 ; 10.342,-7.794 ccw(c0,0) 10.342,7.793
  lines w1.3: 0,11.45 0,12.45
Outline:
  the board outline again, w0.1